# Altium PCB IOTLoRaSmartGreenhouseGateway.PcbDoc
Units mil, origin at the board's own origin, x right, y up, seen from the top; angles counter-clockwise.
Board outline 3110.03 x 2410.03 mil, 2 copper layers (Top Layer, Bottom Layer); 22 components, 19 nets, 94 pads, 8 vias.
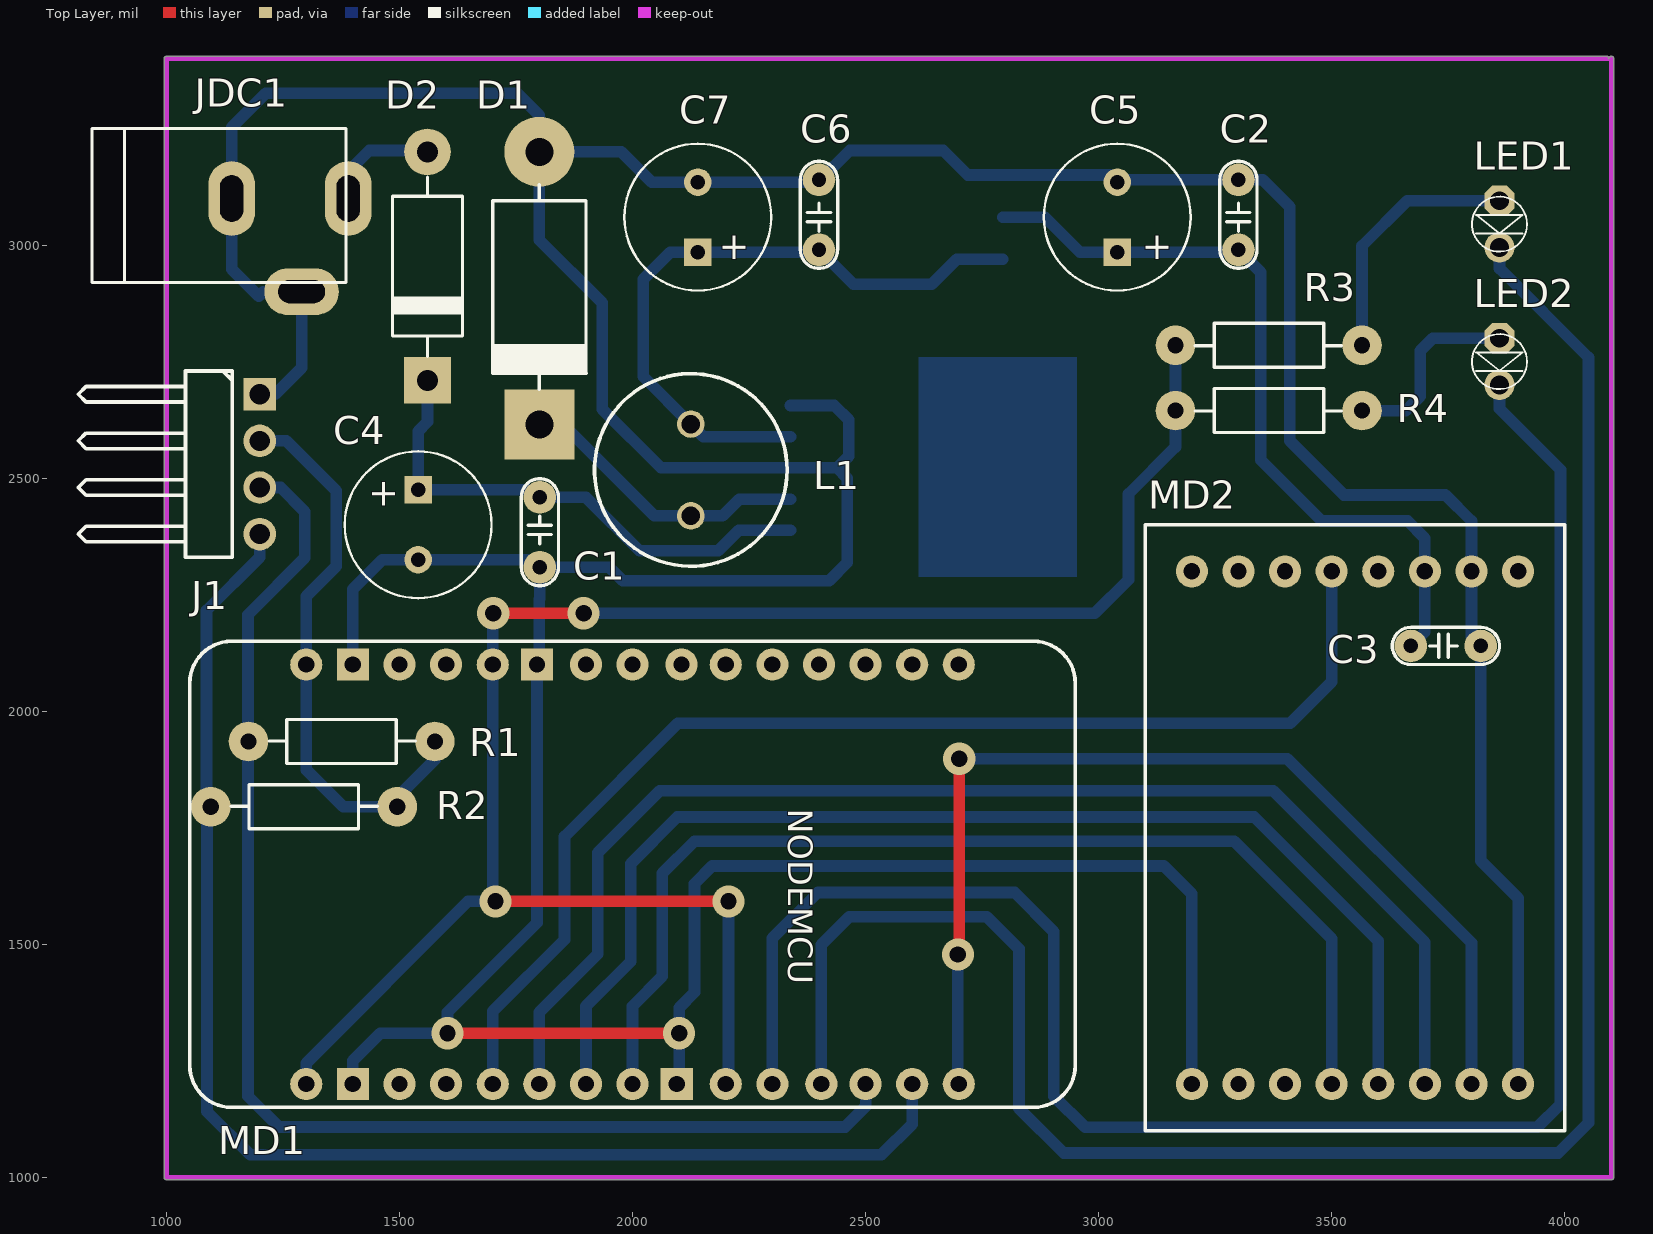
[diagram p0: Top Layer view]
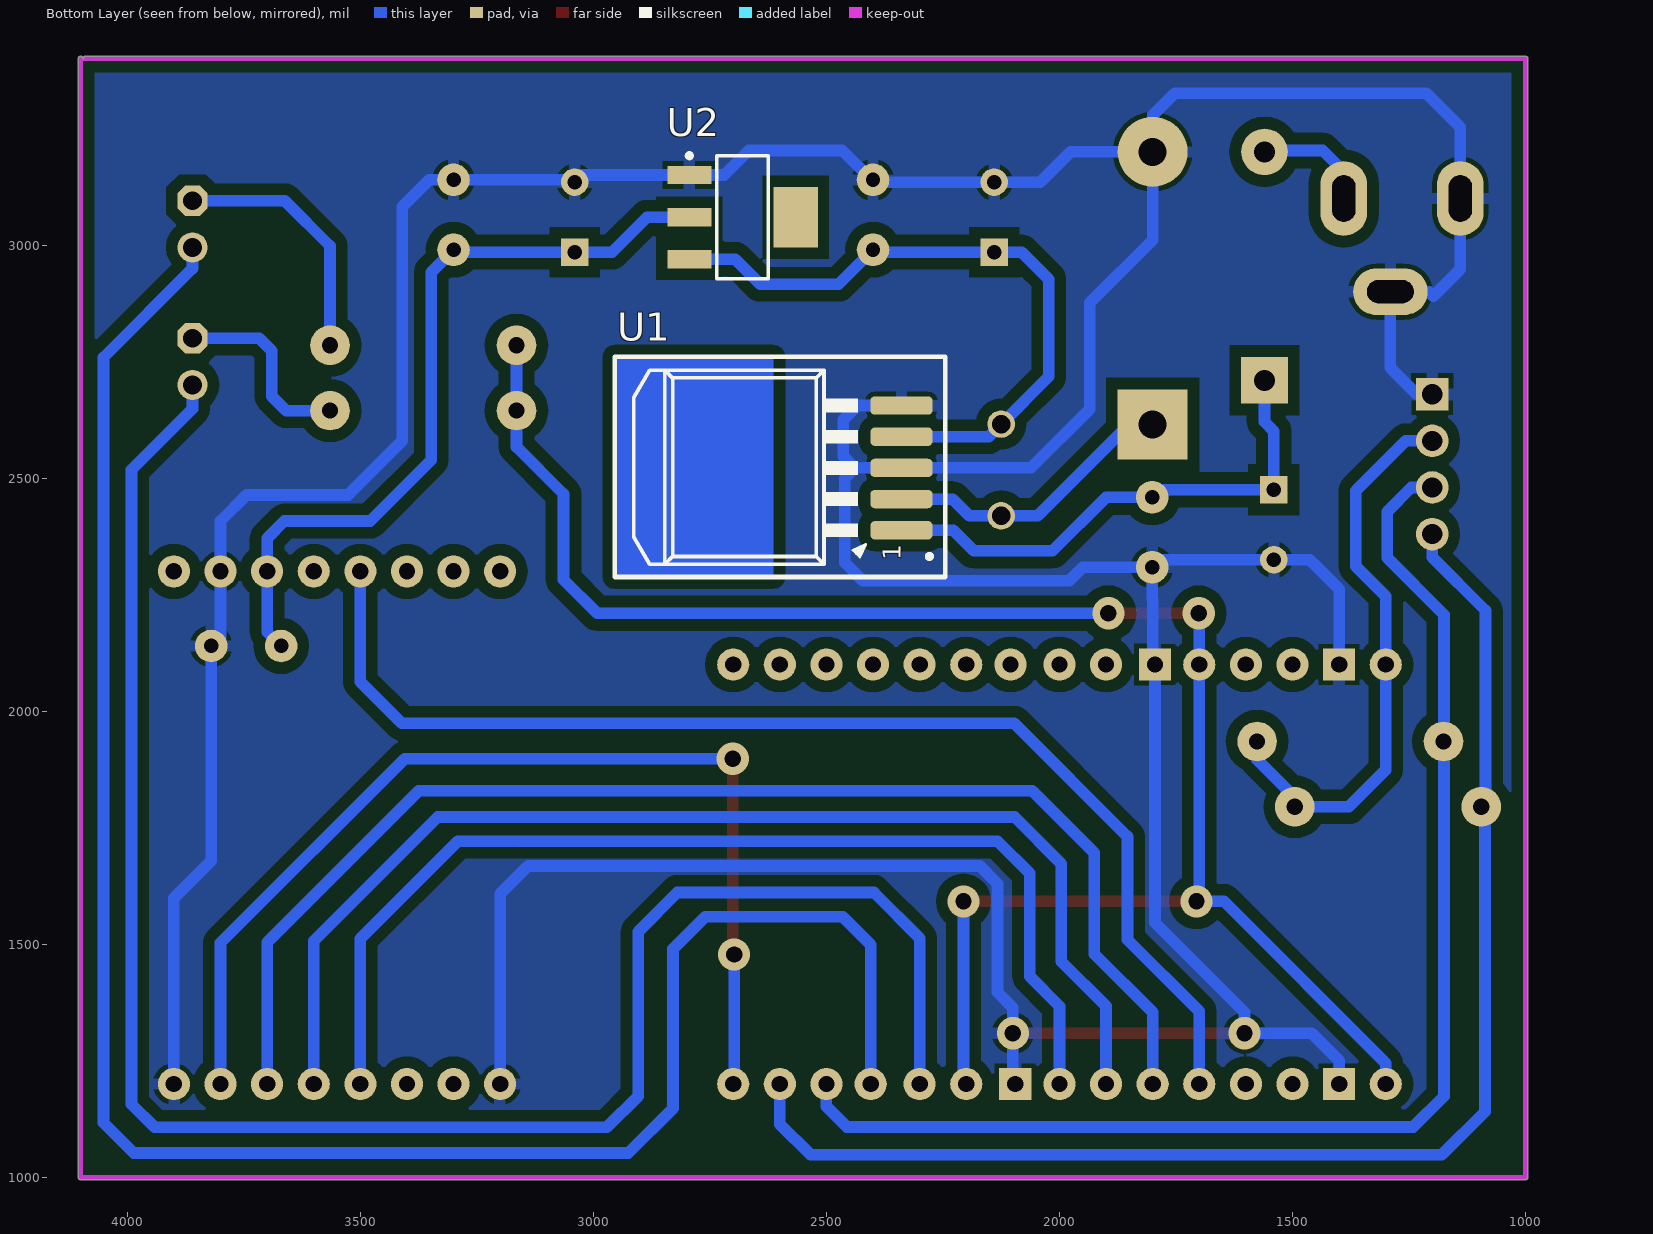
[diagram p1: Bottom Layer view, seen from below]
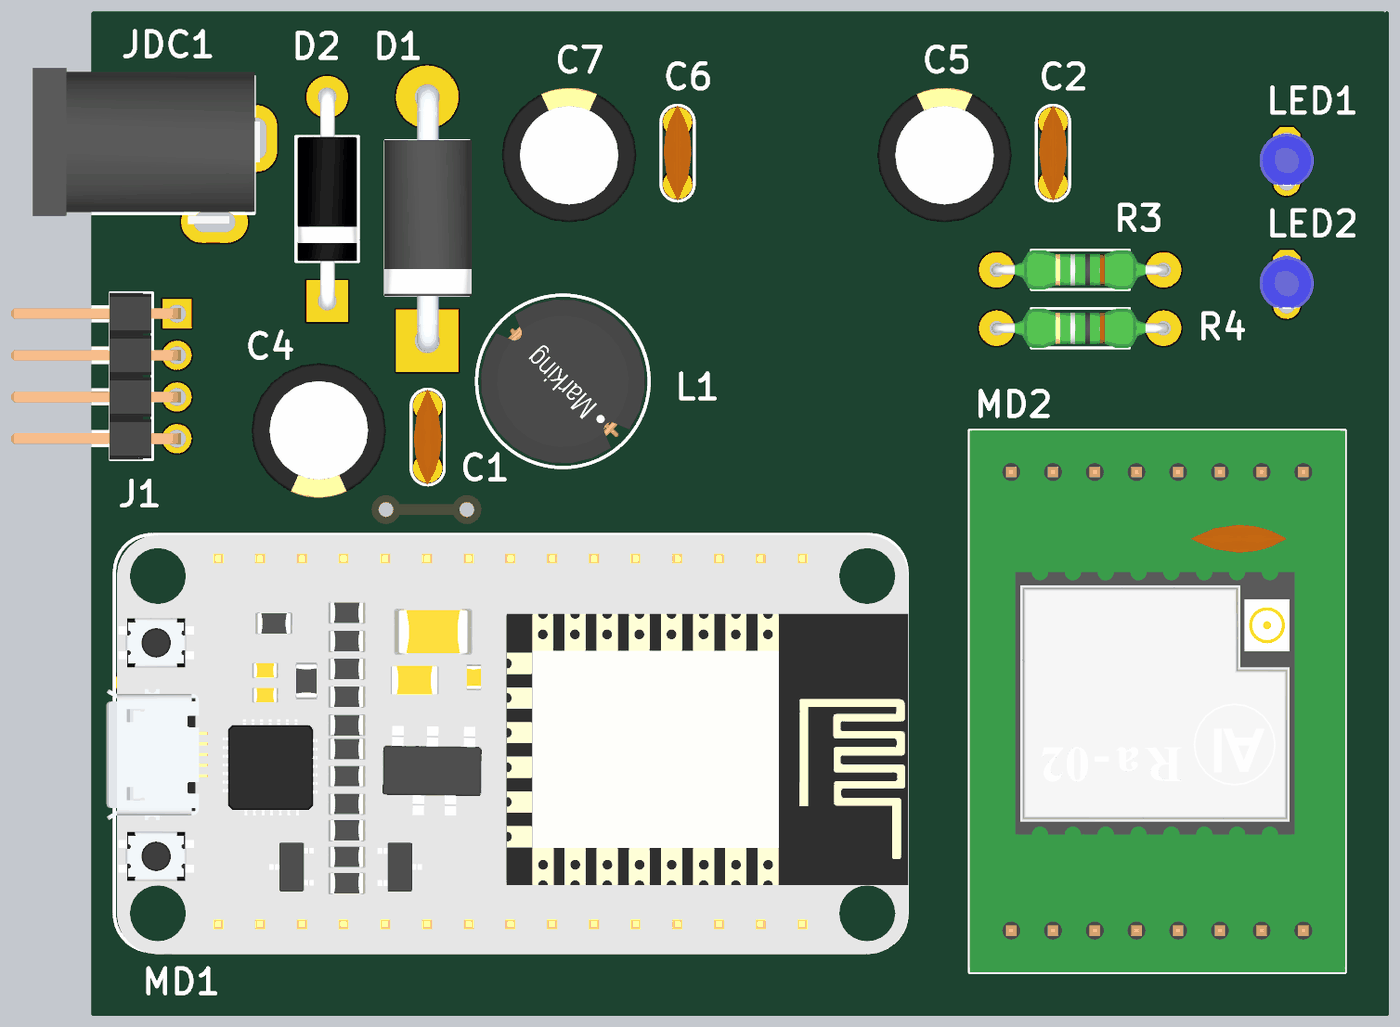
[diagram p2: 3D render of the assembled board from above, using the file's embedded part models]

## Layer stack, top to bottom
Top Solder: solder mask 0.4, Solder Resist, Dk 3.5
Top Layer: signal copper 1.4
Dielectric 1: dielectric 12.6, FR-4, Dk 4.8
Bottom Layer: signal copper 1.4
Bottom Solder: solder mask 0.4, Solder Resist, Dk 3.5

## Board outline
1000,994.99 cw(c1000,1000) 994.99,1000 994.99,3400 cw(c1000,3400) 1000,3405.01 4090,3405.01 cw(c4090,3400) 4095,3400.39 cw(c4100,3400) 4105.02,3400 4105.02,1000 cw(c4100,1000) 4100,994.99

## Design rules (kind name [scope] priority, off if disabled: settings)
Clearance Clearance_1 [InNamedPolygon('GND_L02_P000')] p1: gap=25
Clearance [All] p2: gap=10
PolygonConnect PolygonConnect_1 [All vs IsNamedPolygon('GND_L02_P000')] p1: connectstyle=Relief reliefconductorwidth=25 reliefentries=4 polygonreliefangle="90 Angle" airgapwidth=10
PolygonConnect [All] p2: connectstyle=Relief reliefconductorwidth=10 reliefentries=4 polygonreliefangle="90 Angle" airgapwidth=10
RoutingVias [All] p1: holewidth=35 width=69 viastyle="Through Hole" minholewidth=28 minwidth=50 maxholewidth=50 maxwidth=100
SolderMaskExpansion [All] p1: expansion=4
Width [All] p1: maxlimit=50 minlimit=10 preferedwidth=25
30 further rules are at their usual default settings.

## Components (designator, comment, footprint, x,y, rotation, side; value= is the part's Value field where it differs from the comment)
C1 "100nF" CN1.5 1801,2389 r270 top
C2 "100nF" CN1.5 3300,3060 r90 top
C3 "100nF" CN1.5 3740,2140 r0 top
C4 "220uF" CA-ALU-8 1540,2400 r270 top
C5 "220uF" CA-ALU-8 3040,3060 r90 top
C6 "100nF" CN1.5 2400,3060 r90 top
C7 "220uF" CA-ALU-8 2140,3060 r90 top
D1 "1N5824" DIO-5A 1800,2640 r90 top
D2 "Diode" DIO-3A 1560,2685 r90 top
J1 "JP4" JP4-D1C 1100,2330 r270 top
JDC1 "9VDC" DC0 1265,3000 r0 top
L1 "33uH" L-DIP-M-10 2125,2517.57 r90 top
LED1 "LED" LED-3MM-BLUE 3860,3040 r270 top
LED2 "LED" LED-3MM-BLUE 3860,2745 r270 top
MD1 "NODEMCU-V1.0" NODEMCU-V1.0 1986,1651 r270 top locked
MD2 "LORA-SOCKET" LORA-SOCKET 3800,2000 r270 top locked
R1 "4.7k" RES-1/4W 1280,1800 r180 top
R2 "4.7k" RES-1/4W 1361,1940 r180 top
R3 "1k" RES-1/4W 3380,2780 r0 top
R4 "1k" RES-1/4W 3380,2640 r0 top
U1 "LM2976" TO263 2574,2507 r90 bottom
U2 "LM1117-3.3V" SOT223 2680,3060 r270 bottom

## Footprints (in the part's own frame and the unit in brackets; to place one, negate y for a bottom-side part, rotate by r counter-clockwise, add the part's x,y. Pads: shape width x height; smd on the part's side, far side on the other; paste and mask are expansions set on the pad)
CA-ALU-8 [mm] "Polarized capacitors, Aluminum Electrolytic Capacitors, 2-Leads, Body 8x16x3.5x0.5"
  rect 1.5x1.5 hole 0.8: 1(-1.905,0)
  round 1.5 hole 0.8: 2(1.905,0)
  silkscreen extent -4,-4 4,4, body extent -4.1,-4.1 4.1,4.1, height 14.4
CN1.5 [mil]
  round 70 hole 31: 1(-70,0) 2(80,0)
  silkscreen extent -110,-40 120,40, body extent -110,-33 120,33, height 235
DC0 [mil] "Jac DC input"
  oval 100x160 hole 50 slot 100 at 90 deg: 1(125,100) 2(-125,100)
  oval 160x100 hole 50 slot 100 at 0 deg: 3(25,-100)
  silkscreen extent -425,-80 120,250, body extent -410,-105 134,269, height 434
DIO-3A [mil] "Diode 3A"
  round 100 hole 45: 1(515,0)
  rect 100x100 hole 45: 2(25,0)
  silkscreen extent 76,-75 461,75, body extent 4,-72 536,70, height 142
DIO-5A [mil] "Diode 5A, W 200mil, L 550mil"
  round 150 hole 60: 1(560,0)
  rect 150x150 hole 60: 2(-25,0)
  silkscreen extent 50,-100 490,100, body extent -52,-106 590,103, height 211
JP4-D1C [mil] "4 pins, 1 row, right angled, gold plating"
  rect 70x70 hole 43.31: 1(-350,100)
  round 70 hole 43.31: 2(-250,100) 3(-150,100) 4(-50,100)
  silkscreen extent -400,-289 0,41, body extent -400,-298 0,110, height 100
L-DIP-M-10 [mm] "THT Inductor, 2-Leads, Body 10,0  mm"
  round 1.5 hole 1: 1(-2.5,0) 2(2.5,0)
  silkscreen extent -5.25,-5.25 5.25,5.25, body extent -4.98,-4.97 4.98,4.97, height 14.1
LED-3MM-BLUE [mil]
  oct 65x65 hole 40: 1(-55,0)
  round 65 hole 40: 2(45,0)
  silkscreen extent -64,-59 54,59, body extent -72,-65 54,65, height 184
LORA-SOCKET [mil]
  round 69 hole 35: 1(-300,100) 2(-300,0) 3(-300,-100) 4(-300,-200) 5(-300,-300) 6(-300,-400) 7(-300,-500) 8(-300,-600) 9(800,-600) 10(800,-500) 11(800,-400) 12(800,-300) 13(800,-200) 14(800,-100) 15(800,0) 16(800,100)
  silkscreen extent -400,-700 900,200, body extent -400,-700 900,200, height 246
NODEMCU-V1.0 [mil]
  round 69 hole 35: 3V3(-449,-286) 3V3(451,214) 3V3(451,-686) A0(-449,714) CLK(-449,-86) CMD(-449,119) D0(451,714) D1(451,614) D2(451,514) D3(451,419) D4(451,314) D5(451,14) D6(451,-86) D7(451,-186) D8(451,-286) EN(-449,-386) RST(-449,-486) RSV(-449,514) RSV(-449,614) RX(451,-386) SD0(-449,14) SD1(-449,214) SD2(-449,314) SD3(-449,414) TX(451,-486) VIN(-449,-686)
  rect 69x69 hole 35: GND(-449,-191) GND(-449,-586) GND(451,109) GND(451,-586)
  silkscreen extent -499,-936 501,964, body extent -498,-955 508,967, height 306
RES-1/4W [mil]
  round 85 hole 35: 1(-215,5) 2(185,5)
  silkscreen extent -173,-42 141,52, body extent -227,-42 197,52, height 95
SOT223 [mm]
  rect 1x2.4 smd: 1(-2.3,-2.9) 2(0,-2.9) 3(2.3,-2.9)
  rect 3.3x2.4 smd: 4(0,2.9)
  silkscreen extent -3.47,-3.03 3.35,1.4, body extent -3.25,-3.56 3.25,3.4, height 1.68
TO263 [mm]
  rrect50% 1x3.4 smd: 1(-3.019,-5.969) 2(-1.319,-5.969) 4(2.081,-5.969) 5(3.781,-5.969)
  rrect50% 1x3.4 smd mask+0: 3(0.381,-5.969)
  Top Layer region: -5.568,9.65 6.432,9.65 6.432,1.016 -5.568,1.016
  silkscreen extent -5.57,-8.35 6.43,9.65, body extent -4.73,-6.84 5.43,7.8, height 4.57

## Part data
C1 C2 C3 C6: library part CN
C4 C5 C7: library part CN-ALU-DIP, "Capacitor (Semiconductor SIM Model)"
D1: library part Diode, "Default Diode"
D2: "Default Diode"
J1: "WR-PHD 2.54 mm Angled Socket Header"
JDC1: library part DCIN, "Jac DC input"
L1: library part L-DIP-1, "Inductor"
LED1 LED2: "LED Single colour Green and Red"
MD1: "KIT NodeMCU v1.0"
MD2: "Socket LoRa RA01 va RA02"
R1 R2 R3 R4: library part Res, "Res"
U1: library part LM2596
U2: library part LM1117, "800mA Low-Dropout Linear Regulator"

## Via types
v1: diameter 69, hole 35, Top Layer to Bottom Layer, tented both sides, 8 vias

## Nets (pads, with @x,y where several pads share a name; then routed paths per layer and width w, separated by ;. In a path a pad name is that pad's centre, name@x,y a point inside that pad or via, vN(x,y) a via of type N, cw(c..) or ccw(c..) an arc to the next point about the centre after c; other vN are vias at no path point)
3V3: MD1.3V3 R3.1 R4.1 | length 4049.8
  Top Layer w25: v1(1701,2210) v1(1895,2210) ; v1(1706,1592) v1(2206,1592)
  Bottom Layer w25: MD1.3V3@1300,1200 1300,1245 1647,1592 v1(1706,1592) 1700,1598 1700,2100 1700,2211 v1(1701,2210) ; v1(1895,2210) 2992,2210 3064,2282 3064,2466 3165,2567 R4.1 R3.1 ; MD1.3V3@2200,1200 2206,1206 v1(2206,1592)
5V: J1.2 MD1.VIN R1.1 R2.1 | length 1235.1
  Bottom Layer w25: J1.2 1257,2580 1364,2473 1364,2311 1300,2247 MD1.VIN 1300,1874 1379,1795 R1.1 1495,1815 1576,1896 R2.1
D0: MD1.D0 MD2.15 | length 2265.7
  Top Layer w25: v1(2698,1478) 2701,1481 v1(2701,1898)
  Bottom Layer w25: v1(2698,1478) 2698,1202 MD1.D0 ; v1(2701,1898) 3405,1898 3800,1503 MD2.15
D1: J1.4 MD1.D1 R1.2 | length 2958.1
  Bottom Layer w25: J1.4 1200,2330 1086,2216 1086,1804 R1.2 1087,1787 1087,1141 1180,1048 2534,1048 2600,1114 MD1.D1
D2: J1.3 MD1.D2 R2.2 | length 2841.6
  Bottom Layer w25: J1.3 1245,2480 1297,2428 1297,2329 1175,2207 1175,1174 1241,1108 2456,1108 2500,1152 MD1.D2
D3: LED1.2 MD1.D3 | length 4364.2
  Bottom Layer w25: MD1.D3 2405,1499 2465,1559 2760,1559 2829,1490 2829,1148 2925,1052 3986,1052 4051,1117 4051,2759 3860,2950 LED1.2
D4: LED2.2 MD1.D4 | length 4078.1
  Bottom Layer w25: MD1.D4 2300,1513 2398,1611 2820,1611 2904,1527 2904,1174 2971,1107 3941,1107 3991,1157 3991,2518 3860,2649 LED2.2
D5: MD1.D5 MD2.12 | length 2341.7
  Bottom Layer w25: MD1.D5 2000,1367 2064,1431 2064,1652 2133,1721 3291,1721 3500,1512 MD2.12
D6: MD1.D6 MD2.13 | length 2575.4
  Bottom Layer w25: MD1.D6 1900,1367 1996,1463 1996,1673 2096,1773 3334,1773 3600,1507 MD2.13
D7: MD1.D7 MD2.14 | length 2816.5
  Bottom Layer w25: MD1.D7 1800,1354 1925,1479 1925,1696 2058,1829 3375,1829 3700,1504 MD2.14
D8: MD1.D8 MD2.5 | length 2615.3
  Bottom Layer w25: MD1.D8 1700,1356 1854,1510 1854,1731 2097,1974 3411,1974 3500,2063 MD2.5
GND: C1.2 C2.2 C3.2 C4.2 C5.2 C6.2 C7.2 D1.1 J1.1 JDC1.2 JDC1.3 MD1.GND MD2.2 MD2.9 MD2.16 U1.3 U1.5 U2.1 | length 12209.5
  Top Layer w25: v1(1603,1309) v1(2100,1309)
  Bottom Layer w25: J1.1 1233,2680 1290,2737 JDC1.3 1208,2900 1198,2890 1140,2948 JDC1.2 1140,3253 1213,3326 1753,3326 1800,3279 D1.1 ; MD1.GND@1400,1200 1400,1250 1459,1309 v1(1603,1309) 1603,1354 1795,1546 1795,2100 1800,2105 1800,2240 1801,2241 C1.2 ; MD1.GND@1400,2100 1400,2262 1463,2325 C4.2 1785,2325 C1.2 ; MD1.GND@2095,1200 2100,1205 v1(2100,1309) 2100,1364 2133,1397 2133,1630 2171,1668 3140,1668 3200,1608 MD2.9 ; U1.5 2433.14,2655.86 2464,2625 2464,2547 2439,2522 ; MD2.16 3900,1599 3820,1679 C3.2 3800,2160 MD2.2 3800,2408 3744,2464 3526,2464 3410,2580 3410,3082 3352,3140 C2.2 3045,3140 C5.2 3024.45,3150.55 U2.1 2719.45,3150.55 2667,3203 2466,3203 2403,3140 C6.2 2395,3135 C7.2 2041,3135 1976,3200 D1.1 ; D1.1 1800,3011 1935,2876 1935,2648 2061,2522 U1.3 2439,2522 ; C1.2 1950,2309 1979,2280 2422,2280 2461,2319 2461,2500 2439,2522
NetC1_1: C1.1 C4.1 D2.2 U1.1 | length 1094.8
  Bottom Layer w25: C4.1 1785,2475 C1.1 1900,2459 2015,2344 2184,2344 2228.14,2388.14 U1.1 ; C4.1@1540,2495 1540,2601 1560,2621 D2.2
NetC6_1: C6.1 C7.1 L1.2 U1.4 U2.3 | length 1428.5
  Bottom Layer w25: U1.4 2152.07,2588.93 L1.2 2023,2718 2023,2927 2081,2985 C7.1 2395,2985 C6.1 2474,2916 2642,2916 2695.45,2969.45 U2.3
NetD1_2: D1.2 L1.1 U1.2 | length 635
  Bottom Layer w25: D1.2 1851,2615 2046.85,2419.15 L1.1 2193.15,2419.15 2229.07,2455.07 U1.2
NetD2_1: D2.1 JDC1.1 | length 247.9
  Bottom Layer w25: JDC1.1 1390,3158 1435,3203 1557,3203 D2.1
NetLED1_1: LED1.1 R3.2 | length 548.2
  Bottom Layer w25: R3.2 3565,2998 3662,3095 LED1.1
NetLED2_1: LED2.1 R4.2 | length 416
  Bottom Layer w25: R4.2 3659,2645 3690,2676 3690,2773 3717,2800 LED2.1
VLORA: C2.1 C3.1 C5.1 MD2.3 U2.2 | length 1674.9
  Bottom Layer w25: U2.2 2885,3060 2960,2985 C5.1 3295,2985 C2.1 3348,2942 3348,2539 3479,2408 3663,2408 3700,2371 MD2.3 3700,2170 C3.1
pads on no net: MD1.A0 MD1.CLK MD1.CMD MD1.EN MD1.RST MD1.RSV MD1.RX MD1.SD0 MD1.SD1 MD1.SD2 MD1.SD3 MD1.TX MD2.1 MD2.4 MD2.6 MD2.7 MD2.8 MD2.10 MD2.11 U2.4

## Polygon pours and split planes (outlines as drawn)
GND on Bottom Layer "GND_L02_P000" (solid, remove dead copper, pour order 0): 1000,994.99 cw(c1000,1000) 994.99,1000 994.99,3400 cw(c1000,3400) 1000,3405.01 4090,3405.01 cw(c4090,3400) 4095,3400.39 cw(c4100,3400) 4105.02,3400 4105.02,1000 cw(c4100,1000) 4100,994.99

## Keep-outs
Keep-Out Layer:
  lines w10: 1000,1000 1000,3400 4090,3400 4100,3400 4100,1000 1000,1000

## Text inside footprints (layer, text, board x,y; h text height)
C4: Top Overlay "+" at 1441,2500 h59.06 r270
C5: Top Overlay "+" at 3150,2961 h59.06 r90
C7: Top Overlay "+" at 2243,2961 h59.06 r90
MD1: Top Overlay "NODEMCU" at 2317,1791 h90 r270
U1: Bottom Overlay "1" at 2341,2324.14 h39.37 r270